# EAGLE board Serial-Basic-CH340C-Panel (EAGLE 9.2.1), part 1 of 7
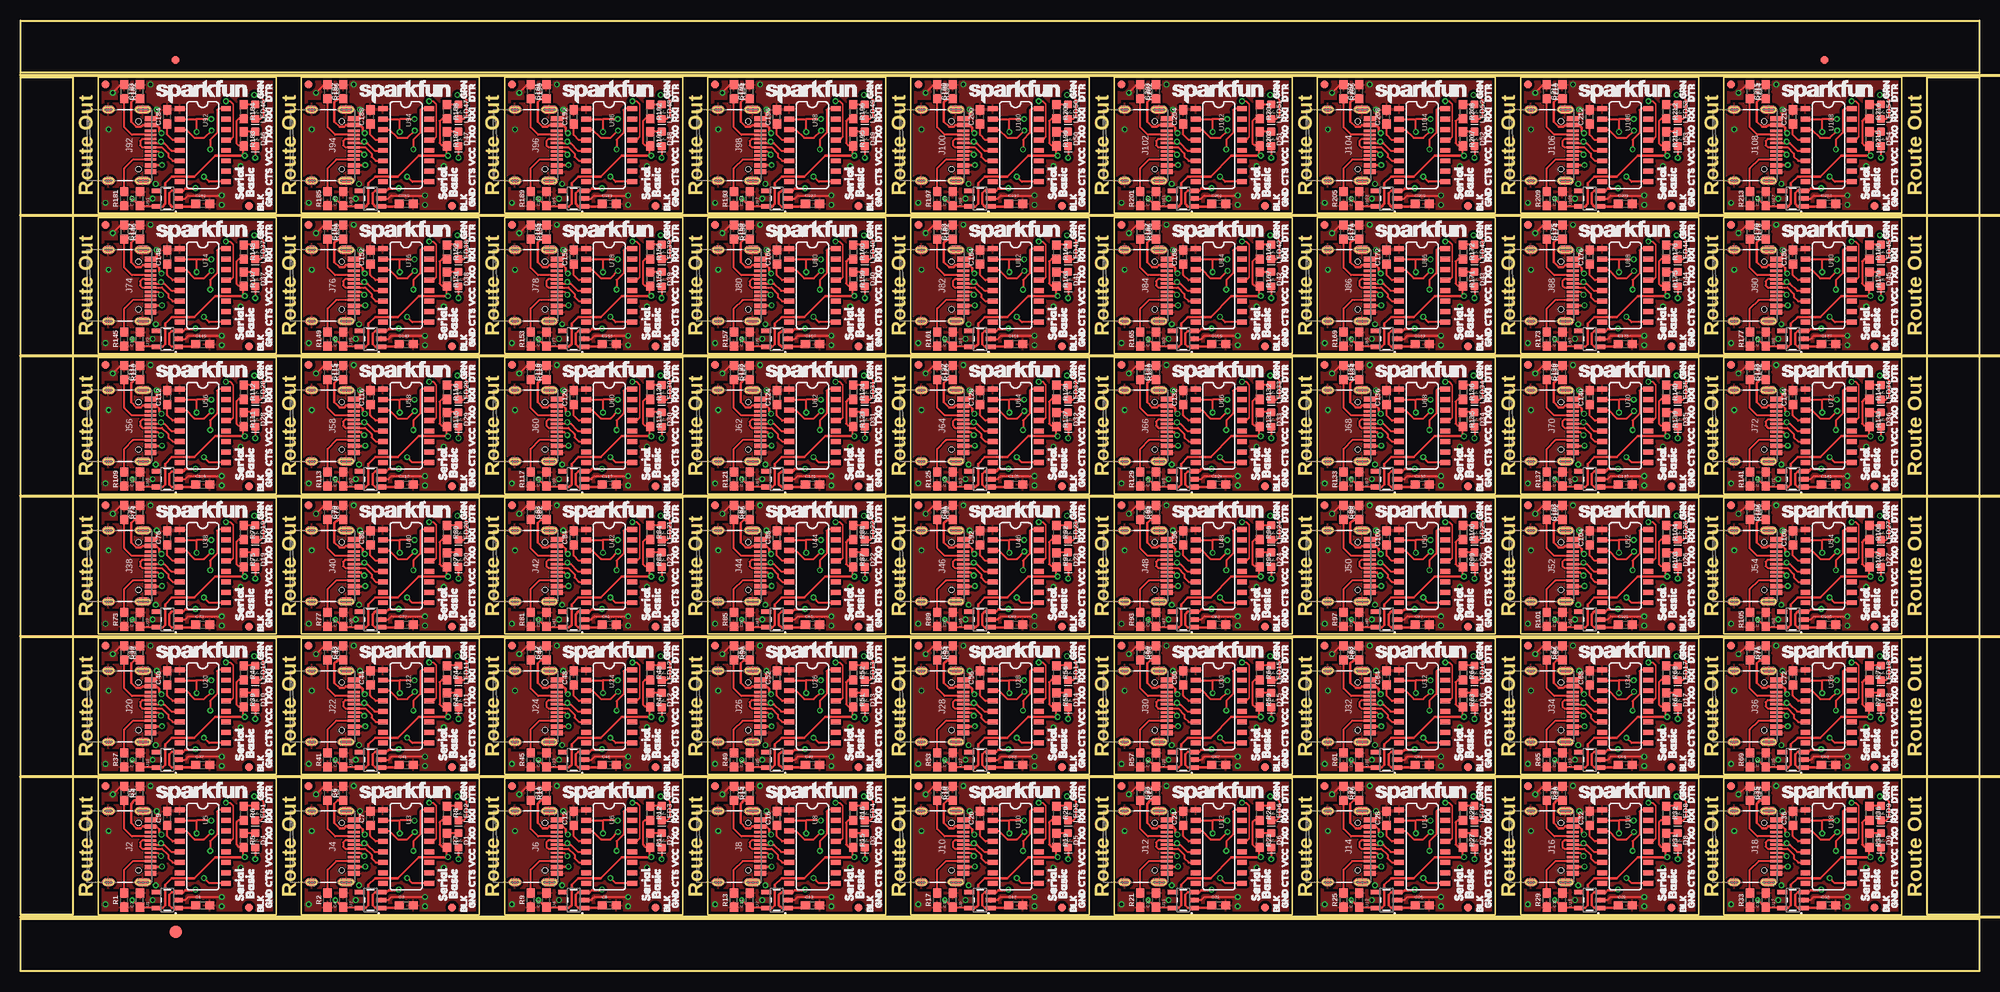
[diagram p0: board, top side]
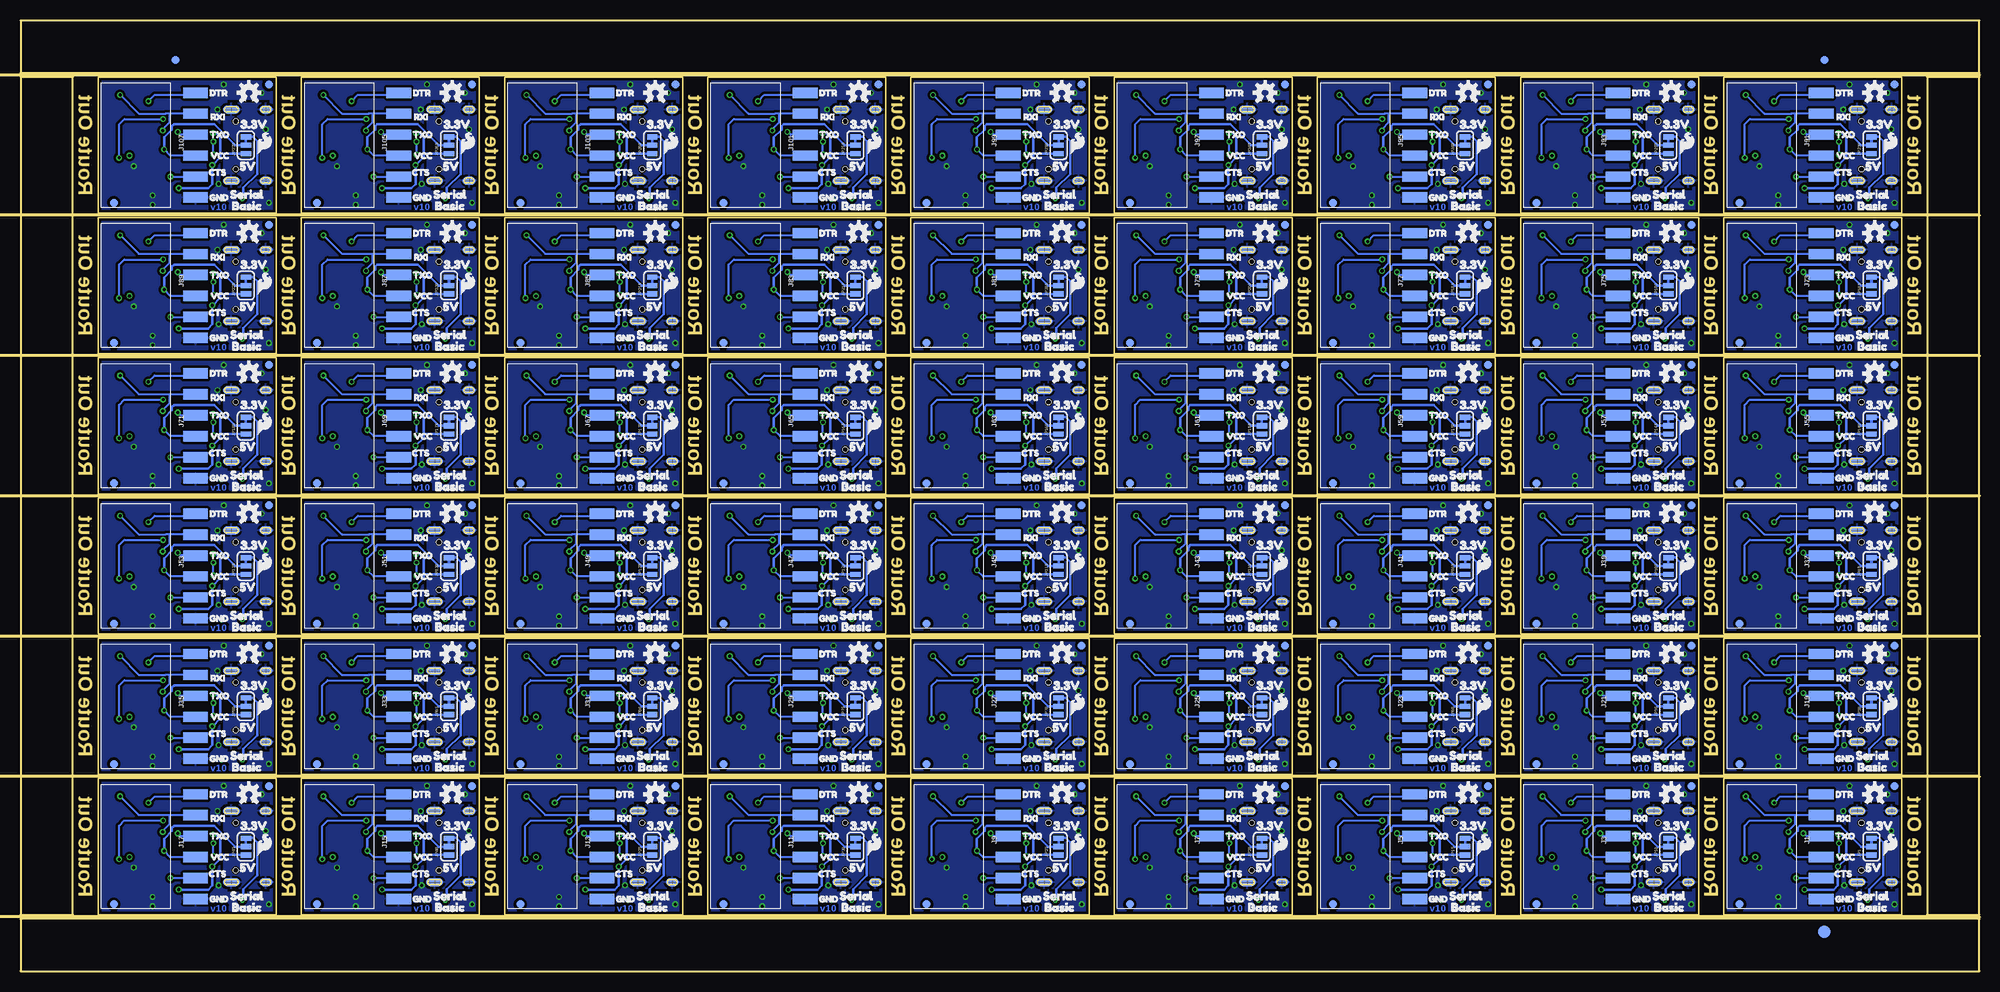
[diagram p1: board, bottom side, seen from below]

Size 237.49 x 115.32 mm. Coordinates in mm from the lower left corner, seen from the top.
Outline: 232 segments
Copper layers (1*16): Top 0.035mm / dielectric 1.5mm / Bottom 0.035mm
Design rules "SparkFun-2-layer-PCBWay-LIMIT": minimum track width 6mil, minimum drill 0.3mm, track to track 6mil, track to pad 6mil, pad to pad 6mil, via to via 6mil, smd to smd 6mil, copper to edge 6mil, drill to drill 6mil, minimum pad ring 6mil, minimum via ring 6mil, stop-mask expansion 4mil, vias tented up to drill 25mil, thermal gap 10mil
Net classes: 1 power: width 0.178 mm
Milling: 7 lines

## Footprints (pad centres in the part's own frame; a part is rotated, then mirrored left to right if it is on the bottom)
0603 = smd 1.1 x 1: 1 -0.85,0; 2 0.85,0
LED-0603 = smd 1 x 1: A -0.877,0; C 0.877,0
FIDUCIAL-1X2 = smd 1 x 1: 1 0,0
FIDUCIAL-1.5X3 = smd 1.5 x 1.5: 1 0,0
1X06-SMD-FEMALE = smd 1.25 x 3: 1 6.35,3.425; 2 3.81,3.425; 3 1.27,3.425; 4 -1.27,3.425; 5 -3.81,3.425; 6 -6.35,3.425
USB-C-16P = smd 0.3 x 1.45: A5 -1.25,0; A6 -0.25,0; A7 0.25,0; A8 1.25,0; B5 1.75,0; B6 0.75,0; B7 -0.75,0; B8 -1.75,0 | smd 0.6 x 1.45: GND -3.225,0; GND2 3.225,0 | smd 1 x 2.1: SHLD1 -4.32,-0.915; SHLD2 4.32,-0.915 | smd 1 x 2.1 bottom: SHLD3 -4.32,-0.915; SHLD4 4.32,-0.915 | smd 1 x 1.6: SHLD5 -4.32,-5.095; SHLD8 4.32,-5.095 | smd 1 x 1.6 bottom: SHLD6 -4.32,-5.095; SHLD7 4.32,-5.095 | smd 0.55 x 1.45: VBUS1 -2.45,0; VBUS2 2.45,0 | hole 0.65: -2.89,-1.445; 2.89,-1.445
SMT-JUMPER_3_1-NC_TRACE_SILK = smd 0.635 x 1.27: 1 -1.016,0; 2 0,0; 3 1.016,0
SOT23-5 = smd 0.55 x 1.2: 1 -0.95,-1.3; 2 0,-1.3; 3 0.95,-1.3; 4 0.95,1.3; 5 -0.95,1.3
SO016 = smd 0.6 x 1.2: 1 -4.445,-2.8; 2 -3.175,-2.8; 3 -1.905,-2.8; 4 -0.635,-2.8; 5 0.635,-2.8; 6 1.905,-2.8; 7 3.175,-2.8; 8 4.445,-2.8; 9 4.445,2.8; 10 3.175,2.8; 11 1.905,2.8; 12 0.635,2.8; 13 -0.635,2.8; 14 -1.905,2.8; 15 -3.175,2.8; 16 -4.445,2.8

## Placement (x,y rotation side)
C1  1.0uF  [0603]  22.1,8 0 top
C2  1.0uF  [0603]  14.48,8.64 90 top
C3  1.0uF  [0603]  46.74,8 0 top
C4  1.0uF  [0603]  39.12,8.64 90 top
C5  0.1uF  [0603]  14.48,21.59 90 top
C6  0.1uF  [0603]  39.12,21.59 90 top
C7  10nF  [0603]  42.42,18.54 90 top
C8  1.0uF  [0603]  71.37,8 0 top
C9  10nF  [0603]  17.78,18.54 90 top
C10  1.0uF  [0603]  63.75,8.64 90 top
C11  0.1uF  [0603]  63.75,21.59 90 top
C12  10nF  [0603]  67.06,18.54 90 top
C13  1.0uF  [0603]  96.01,8 0 top
C14  1.0uF  [0603]  88.39,8.64 90 top
C15  0.1uF  [0603]  88.39,21.59 90 top
C16  10nF  [0603]  91.69,18.54 90 top
C17  1.0uF  [0603]  120.65,8 0 top
C18  1.0uF  [0603]  113.03,8.64 90 top
C19  0.1uF  [0603]  113.03,21.59 90 top
C20  10nF  [0603]  116.33,18.54 90 top
C21  1.0uF  [0603]  145.29,8 0 top
C22  1.0uF  [0603]  137.67,8.64 90 top
C23  0.1uF  [0603]  137.67,21.59 90 top
C24  10nF  [0603]  140.97,18.54 90 top
C25  1.0uF  [0603]  169.93,8 0 top
C26  1.0uF  [0603]  162.31,8.64 90 top
C27  0.1uF  [0603]  162.31,21.59 90 top
C28  10nF  [0603]  165.61,18.54 90 top
C29  1.0uF  [0603]  194.56,8 0 top
C30  1.0uF  [0603]  186.94,8.64 90 top
C31  0.1uF  [0603]  186.94,21.59 90 top
C32  10nF  [0603]  190.25,18.54 90 top
C33  1.0uF  [0603]  219.2,8 0 top
C34  1.0uF  [0603]  211.58,8.64 90 top
C35  0.1uF  [0603]  211.58,21.59 90 top
C36  10nF  [0603]  214.88,18.54 90 top
C37  1.0uF  [0603]  22.1,25.02 0 top
C38  1.0uF  [0603]  14.48,25.65 90 top
C39  0.1uF  [0603]  14.48,38.61 90 top
C40  10nF  [0603]  17.78,35.56 90 top
C41  1.0uF  [0603]  46.74,25.02 0 top
C42  1.0uF  [0603]  39.12,25.65 90 top
C43  0.1uF  [0603]  39.12,38.61 90 top
C44  10nF  [0603]  42.42,35.56 90 top
C45  1.0uF  [0603]  71.37,25.02 0 top
C46  1.0uF  [0603]  63.75,25.65 90 top
C47  0.1uF  [0603]  63.75,38.61 90 top
C48  10nF  [0603]  67.06,35.56 90 top
C49  1.0uF  [0603]  96.01,25.02 0 top
C50  1.0uF  [0603]  88.39,25.65 90 top
C51  0.1uF  [0603]  88.39,38.61 90 top
C52  10nF  [0603]  91.69,35.56 90 top
C53  1.0uF  [0603]  120.65,25.02 0 top
C54  1.0uF  [0603]  113.03,25.65 90 top
C55  0.1uF  [0603]  113.03,38.61 90 top
C56  10nF  [0603]  116.33,35.56 90 top
C57  1.0uF  [0603]  145.29,25.02 0 top
C58  1.0uF  [0603]  137.67,25.65 90 top
C59  0.1uF  [0603]  137.67,38.61 90 top
C60  10nF  [0603]  140.97,35.56 90 top
C61  1.0uF  [0603]  169.93,25.02 0 top
C62  1.0uF  [0603]  162.31,25.65 90 top
C63  0.1uF  [0603]  162.31,38.61 90 top
C64  10nF  [0603]  165.61,35.56 90 top
C65  1.0uF  [0603]  194.56,25.02 0 top
C66  1.0uF  [0603]  186.94,25.65 90 top
C67  0.1uF  [0603]  186.94,38.61 90 top
C68  10nF  [0603]  190.25,35.56 90 top
C69  1.0uF  [0603]  219.2,25.02 0 top
C70  1.0uF  [0603]  211.58,25.65 90 top
C71  0.1uF  [0603]  211.58,38.61 90 top
C72  10nF  [0603]  214.88,35.56 90 top
C73  1.0uF  [0603]  22.1,42.04 0 top
C74  1.0uF  [0603]  14.48,42.67 90 top
C75  0.1uF  [0603]  14.48,55.63 90 top
C76  10nF  [0603]  17.78,52.58 90 top
C77  1.0uF  [0603]  46.74,42.04 0 top
C78  1.0uF  [0603]  39.12,42.67 90 top
C79  0.1uF  [0603]  39.12,55.63 90 top
C80  10nF  [0603]  42.42,52.58 90 top
C81  1.0uF  [0603]  71.37,42.04 0 top
C82  1.0uF  [0603]  63.75,42.67 90 top
C83  0.1uF  [0603]  63.75,55.63 90 top
C84  10nF  [0603]  67.06,52.58 90 top
C85  1.0uF  [0603]  96.01,42.04 0 top
C86  1.0uF  [0603]  88.39,42.67 90 top
C87  0.1uF  [0603]  88.39,55.63 90 top
C88  10nF  [0603]  91.69,52.58 90 top
C89  1.0uF  [0603]  120.65,42.04 0 top
C90  1.0uF  [0603]  113.03,42.67 90 top
C91  0.1uF  [0603]  113.03,55.63 90 top
C92  10nF  [0603]  116.33,52.58 90 top
C93  1.0uF  [0603]  145.29,42.04 0 top
C94  1.0uF  [0603]  137.67,42.67 90 top
C95  0.1uF  [0603]  137.67,55.63 90 top
C96  10nF  [0603]  140.97,52.58 90 top
C97  1.0uF  [0603]  169.93,42.04 0 top
C98  1.0uF  [0603]  162.31,42.67 90 top
C99  0.1uF  [0603]  162.31,55.63 90 top
C100  10nF  [0603]  165.61,52.58 90 top
C101  1.0uF  [0603]  194.56,42.04 0 top
C102  1.0uF  [0603]  186.94,42.67 90 top
C103  0.1uF  [0603]  186.94,55.63 90 top
C104  10nF  [0603]  190.25,52.58 90 top
C105  1.0uF  [0603]  219.2,42.04 0 top
C106  1.0uF  [0603]  211.58,42.67 90 top
C107  0.1uF  [0603]  211.58,55.63 90 top
C108  10nF  [0603]  214.88,52.58 90 top
C109  1.0uF  [0603]  22.1,59.05 0 top
C110  1.0uF  [0603]  14.48,59.69 90 top
C111  0.1uF  [0603]  14.48,72.64 90 top
C112  10nF  [0603]  17.78,69.6 90 top
C113  1.0uF  [0603]  46.74,59.05 0 top
C114  1.0uF  [0603]  39.12,59.69 90 top
C115  0.1uF  [0603]  39.12,72.64 90 top
C116  10nF  [0603]  42.42,69.6 90 top
C117  1.0uF  [0603]  71.37,59.05 0 top
C118  1.0uF  [0603]  63.75,59.69 90 top
C119  0.1uF  [0603]  63.75,72.64 90 top
C120  10nF  [0603]  67.06,69.6 90 top
C121  1.0uF  [0603]  96.01,59.05 0 top
C122  1.0uF  [0603]  88.39,59.69 90 top
C123  0.1uF  [0603]  88.39,72.64 90 top
C124  10nF  [0603]  91.69,69.6 90 top
C125  1.0uF  [0603]  120.65,59.05 0 top
C126  1.0uF  [0603]  113.03,59.69 90 top
C127  0.1uF  [0603]  113.03,72.64 90 top
C128  10nF  [0603]  116.33,69.6 90 top
C129  1.0uF  [0603]  145.29,59.05 0 top
C130  1.0uF  [0603]  137.67,59.69 90 top
C131  0.1uF  [0603]  137.67,72.64 90 top
C132  10nF  [0603]  140.97,69.6 90 top
C133  1.0uF  [0603]  169.93,59.05 0 top
C134  1.0uF  [0603]  162.31,59.69 90 top
C135  0.1uF  [0603]  162.31,72.64 90 top
C136  10nF  [0603]  165.61,69.6 90 top
C137  1.0uF  [0603]  194.56,59.05 0 top
C138  1.0uF  [0603]  186.94,59.69 90 top
C139  0.1uF  [0603]  186.94,72.64 90 top
C140  10nF  [0603]  190.25,69.6 90 top
C141  1.0uF  [0603]  219.2,59.05 0 top
C142  1.0uF  [0603]  211.58,59.69 90 top
C143  0.1uF  [0603]  211.58,72.64 90 top
C144  10nF  [0603]  214.88,69.6 90 top
C145  1.0uF  [0603]  22.1,76.07 0 top
C146  1.0uF  [0603]  14.48,76.71 90 top
C147  0.1uF  [0603]  14.48,89.66 90 top
C148  10nF  [0603]  17.78,86.61 90 top
C149  1.0uF  [0603]  46.74,76.07 0 top
C150  1.0uF  [0603]  39.12,76.71 90 top
C151  0.1uF  [0603]  39.12,89.66 90 top
C152  10nF  [0603]  42.42,86.61 90 top
C153  1.0uF  [0603]  71.37,76.07 0 top
C154  1.0uF  [0603]  63.75,76.71 90 top
C155  0.1uF  [0603]  63.75,89.66 90 top
C156  10nF  [0603]  67.06,86.61 90 top
C157  1.0uF  [0603]  96.01,76.07 0 top
C158  1.0uF  [0603]  88.39,76.71 90 top
C159  0.1uF  [0603]  88.39,89.66 90 top
C160  10nF  [0603]  91.69,86.61 90 top
C161  1.0uF  [0603]  120.65,76.07 0 top
C162  1.0uF  [0603]  113.03,76.71 90 top
C163  0.1uF  [0603]  113.03,89.66 90 top
C164  10nF  [0603]  116.33,86.61 90 top
C165  1.0uF  [0603]  145.29,76.07 0 top
C166  1.0uF  [0603]  137.67,76.71 90 top
C167  0.1uF  [0603]  137.67,89.66 90 top
C168  10nF  [0603]  140.97,86.61 90 top
C169  1.0uF  [0603]  169.93,76.07 0 top
C170  1.0uF  [0603]  162.31,76.71 90 top
C171  0.1uF  [0603]  162.31,89.66 90 top
C172  10nF  [0603]  165.61,86.61 90 top
C173  1.0uF  [0603]  194.56,76.07 0 top
C174  1.0uF  [0603]  186.94,76.71 90 top
C175  0.1uF  [0603]  186.94,89.66 90 top
C176  10nF  [0603]  190.25,86.61 90 top
C177  1.0uF  [0603]  219.2,76.07 0 top
C178  1.0uF  [0603]  211.58,76.71 90 top
C179  0.1uF  [0603]  211.58,89.66 90 top
C180  10nF  [0603]  214.88,86.61 90 top
C181  1.0uF  [0603]  22.1,93.09 0 top
C182  1.0uF  [0603]  14.48,93.73 90 top
C183  0.1uF  [0603]  14.48,106.68 90 top
C184  10nF  [0603]  17.78,103.63 90 top
C185  1.0uF  [0603]  46.74,93.09 0 top
C186  1.0uF  [0603]  39.12,93.73 90 top
C187  0.1uF  [0603]  39.12,106.68 90 top
C188  10nF  [0603]  42.42,103.63 90 top
C189  1.0uF  [0603]  71.37,93.09 0 top
C190  1.0uF  [0603]  63.75,93.73 90 top
C191  0.1uF  [0603]  63.75,106.68 90 top
C192  10nF  [0603]  67.06,103.63 90 top
C193  1.0uF  [0603]  96.01,93.09 0 top
C194  1.0uF  [0603]  88.39,93.73 90 top
C195  0.1uF  [0603]  88.39,106.68 90 top
C196  10nF  [0603]  91.69,103.63 90 top
C197  1.0uF  [0603]  120.65,93.09 0 top
C198  1.0uF  [0603]  113.03,93.73 90 top
C199  0.1uF  [0603]  113.03,106.68 90 top
C200  10nF  [0603]  116.33,103.63 90 top
C201  1.0uF  [0603]  145.29,93.09 0 top
C202  1.0uF  [0603]  137.67,93.73 90 top
C203  0.1uF  [0603]  137.67,106.68 90 top
C204  10nF  [0603]  140.97,103.63 90 top
C205  1.0uF  [0603]  169.93,93.09 0 top
C206  1.0uF  [0603]  162.31,93.73 90 top
C207  0.1uF  [0603]  162.31,106.68 90 top
C208  10nF  [0603]  165.61,103.63 90 top
C209  1.0uF  [0603]  194.56,93.09 0 top
C210  1.0uF  [0603]  186.94,93.73 90 top
C211  0.1uF  [0603]  186.94,106.68 90 top
C212  10nF  [0603]  190.25,103.63 90 top
C213  1.0uF  [0603]  219.2,93.09 0 top
C214  1.0uF  [0603]  211.58,93.73 90 top
C215  0.1uF  [0603]  211.58,106.68 90 top
C216  10nF  [0603]  214.88,103.63 90 top
D1  Yellow  [LED-0603]  53.09,15.88 270 top
D2  Yellow  [LED-0603]  77.72,15.88 270 top
D3  Yellow  [LED-0603]  102.36,15.88 270 top
D4  Yellow  [LED-0603]  28.45,15.88 270 top
D5  Yellow  [LED-0603]  127,15.88 270 top
D6  Yellow  [LED-0603]  151.64,15.88 270 top
D7  Yellow  [LED-0603]  176.28,15.88 270 top
D8  Yellow  [LED-0603]  200.91,15.88 270 top
D9  Yellow  [LED-0603]  225.55,15.88 270 top
D10  Yellow  [LED-0603]  28.45,32.89 270 top
D11  Yellow  [LED-0603]  53.09,32.89 270 top
D12  Yellow  [LED-0603]  77.72,32.89 270 top
D13  Yellow  [LED-0603]  102.36,32.89 270 top
D14  Yellow  [LED-0603]  127,32.89 270 top
D15  Yellow  [LED-0603]  151.64,32.89 270 top
D16  Yellow  [LED-0603]  176.28,32.89 270 top
D17  Yellow  [LED-0603]  200.91,32.89 270 top
D18  Yellow  [LED-0603]  225.55,32.89 270 top
D19  Yellow  [LED-0603]  28.45,49.91 270 top
D20  Yellow  [LED-0603]  53.09,49.91 270 top
D21  Yellow  [LED-0603]  77.72,49.91 270 top
D22  Yellow  [LED-0603]  102.36,49.91 270 top
D23  Yellow  [LED-0603]  127,49.91 270 top
D24  Yellow  [LED-0603]  151.64,49.91 270 top
D25  Yellow  [LED-0603]  176.28,49.91 270 top
D26  Yellow  [LED-0603]  200.91,49.91 270 top
D27  Yellow  [LED-0603]  225.55,49.91 270 top
D28  Yellow  [LED-0603]  28.45,66.93 270 top
D29  Yellow  [LED-0603]  53.09,66.93 270 top
D30  Yellow  [LED-0603]  77.72,66.93 270 top
D31  Yellow  [LED-0603]  102.36,66.93 270 top
D32  Yellow  [LED-0603]  127,66.93 270 top
D33  Yellow  [LED-0603]  151.64,66.93 270 top
D34  Yellow  [LED-0603]  176.28,66.93 270 top
D35  Yellow  [LED-0603]  200.91,66.93 270 top
D36  Yellow  [LED-0603]  225.55,66.93 270 top
D37  Yellow  [LED-0603]  28.45,83.95 270 top
D38  Yellow  [LED-0603]  53.09,83.95 270 top
D39  Yellow  [LED-0603]  77.72,83.95 270 top
D40  Yellow  [LED-0603]  102.36,83.95 270 top
D41  Yellow  [LED-0603]  127,83.95 270 top
D42  Yellow  [LED-0603]  151.64,83.95 270 top
D43  Yellow  [LED-0603]  176.28,83.95 270 top
D44  Yellow  [LED-0603]  200.91,83.95 270 top
D45  Yellow  [LED-0603]  225.55,83.95 270 top
D46  Yellow  [LED-0603]  28.45,100.97 270 top
D47  Yellow  [LED-0603]  53.09,100.97 270 top
D48  Yellow  [LED-0603]  77.72,100.97 270 top
D49  Yellow  [LED-0603]  102.36,100.97 270 top
D50  Yellow  [LED-0603]  127,100.97 270 top
D51  Yellow  [LED-0603]  151.64,100.97 270 top
D52  Yellow  [LED-0603]  176.28,100.97 270 top
D53  Yellow  [LED-0603]  200.91,100.97 270 top
D54  Yellow  [LED-0603]  225.55,100.97 270 top
E$1  [FIDUCIAL-1X2]  18.8,110.55 0 top
E$2  [FIDUCIAL-1X2]  18.8,110.55 0 bottom
E$3  [FIDUCIAL-1X2]  218.69,110.55 0 top
E$4  [FIDUCIAL-1X2]  218.69,110.55 0 bottom
E$5  [FIDUCIAL-1.5X3]  18.8,4.76 0 top
E$6  [FIDUCIAL-1.5X3]  18.8,4.76 0 bottom
J1  [1X06-SMD-FEMALE]  22.61,15.11 270 bottom
J2  [USB-C-16P]  15.75,15.11 270 top
J3  [1X06-SMD-FEMALE]  47.24,15.11 270 bottom
J4  [USB-C-16P]  40.39,15.11 270 top
J5  [1X06-SMD-FEMALE]  71.88,15.11 270 bottom
J6  [USB-C-16P]  65.02,15.11 270 top
J7  [1X06-SMD-FEMALE]  96.52,15.11 270 bottom
J8  [USB-C-16P]  89.66,15.11 270 top
J9  [1X06-SMD-FEMALE]  121.16,15.11 270 bottom
J10  [USB-C-16P]  114.3,15.11 270 top
J11  [1X06-SMD-FEMALE]  145.8,15.11 270 bottom
J12  [USB-C-16P]  138.94,15.11 270 top
J13  [1X06-SMD-FEMALE]  170.43,15.11 270 bottom
J14  [USB-C-16P]  163.58,15.11 270 top
J15  [1X06-SMD-FEMALE]  195.07,15.11 270 bottom
J16  [USB-C-16P]  188.21,15.11 270 top
J17  [1X06-SMD-FEMALE]  219.71,15.11 270 bottom
J18  [USB-C-16P]  212.85,15.11 270 top
J19  [1X06-SMD-FEMALE]  22.61,32.13 270 bottom
J20  [USB-C-16P]  15.75,32.13 270 top
J21  [1X06-SMD-FEMALE]  47.24,32.13 270 bottom
J22  [USB-C-16P]  40.39,32.13 270 top
J23  [1X06-SMD-FEMALE]  71.88,32.13 270 bottom
J24  [USB-C-16P]  65.02,32.13 270 top
J25  [1X06-SMD-FEMALE]  96.52,32.13 270 bottom
J26  [USB-C-16P]  89.66,32.13 270 top
J27  [1X06-SMD-FEMALE]  121.16,32.13 270 bottom
J28  [USB-C-16P]  114.3,32.13 270 top
J29  [1X06-SMD-FEMALE]  145.8,32.13 270 bottom
J30  [USB-C-16P]  138.94,32.13 270 top
J31  [1X06-SMD-FEMALE]  170.43,32.13 270 bottom
J32  [USB-C-16P]  163.58,32.13 270 top
J33  [1X06-SMD-FEMALE]  195.07,32.13 270 bottom
J34  [USB-C-16P]  188.21,32.13 270 top
J35  [1X06-SMD-FEMALE]  219.71,32.13 270 bottom
J36  [USB-C-16P]  212.85,32.13 270 top
J37  [1X06-SMD-FEMALE]  22.61,49.15 270 bottom
J38  [USB-C-16P]  15.75,49.15 270 top
J39  [1X06-SMD-FEMALE]  47.24,49.15 270 bottom
J40  [USB-C-16P]  40.39,49.15 270 top
J41  [1X06-SMD-FEMALE]  71.88,49.15 270 bottom
J42  [USB-C-16P]  65.02,49.15 270 top
J43  [1X06-SMD-FEMALE]  96.52,49.15 270 bottom
J44  [USB-C-16P]  89.66,49.15 270 top
J45  [1X06-SMD-FEMALE]  121.16,49.15 270 bottom
J46  [USB-C-16P]  114.3,49.15 270 top
J47  [1X06-SMD-FEMALE]  145.8,49.15 270 bottom
J48  [USB-C-16P]  138.94,49.15 270 top
J49  [1X06-SMD-FEMALE]  170.43,49.15 270 bottom
J50  [USB-C-16P]  163.58,49.15 270 top
J51  [1X06-SMD-FEMALE]  195.07,49.15 270 bottom
J52  [USB-C-16P]  188.21,49.15 270 top
J53  [1X06-SMD-FEMALE]  219.71,49.15 270 bottom
J54  [USB-C-16P]  212.85,49.15 270 top
J55  [1X06-SMD-FEMALE]  22.61,66.17 270 bottom
J56  [USB-C-16P]  15.75,66.17 270 top
J57  [1X06-SMD-FEMALE]  47.24,66.17 270 bottom
J58  [USB-C-16P]  40.39,66.17 270 top
J59  [1X06-SMD-FEMALE]  71.88,66.17 270 bottom
J60  [USB-C-16P]  65.02,66.17 270 top
J61  [1X06-SMD-FEMALE]  96.52,66.17 270 bottom
J62  [USB-C-16P]  89.66,66.17 270 top
J63  [1X06-SMD-FEMALE]  121.16,66.17 270 bottom
J64  [USB-C-16P]  114.3,66.17 270 top
J65  [1X06-SMD-FEMALE]  145.8,66.17 270 bottom
J66  [USB-C-16P]  138.94,66.17 270 top
J67  [1X06-SMD-FEMALE]  170.43,66.17 270 bottom
J68  [USB-C-16P]  163.58,66.17 270 top
J69  [1X06-SMD-FEMALE]  195.07,66.17 270 bottom
J70  [USB-C-16P]  188.21,66.17 270 top
J71  [1X06-SMD-FEMALE]  219.71,66.17 270 bottom
J72  [USB-C-16P]  212.85,66.17 270 top
J73  [1X06-SMD-FEMALE]  22.61,83.19 270 bottom
J74  [USB-C-16P]  15.75,83.19 270 top
J75  [1X06-SMD-FEMALE]  47.24,83.19 270 bottom
J76  [USB-C-16P]  40.39,83.19 270 top
J77  [1X06-SMD-FEMALE]  71.88,83.19 270 bottom
J78  [USB-C-16P]  65.02,83.19 270 top
J79  [1X06-SMD-FEMALE]  96.52,83.19 270 bottom
J80  [USB-C-16P]  89.66,83.19 270 top
J81  [1X06-SMD-FEMALE]  121.16,83.19 270 bottom
J82  [USB-C-16P]  114.3,83.19 270 top
J83  [1X06-SMD-FEMALE]  145.8,83.19 270 bottom
J84  [USB-C-16P]  138.94,83.19 270 top
J85  [1X06-SMD-FEMALE]  170.43,83.19 270 bottom
J86  [USB-C-16P]  163.58,83.19 270 top
J87  [1X06-SMD-FEMALE]  195.07,83.19 270 bottom
J88  [USB-C-16P]  188.21,83.19 270 top
J89  [1X06-SMD-FEMALE]  219.71,83.19 270 bottom
J90  [USB-C-16P]  212.85,83.19 270 top
J91  [1X06-SMD-FEMALE]  22.61,100.2 270 bottom
J92  [USB-C-16P]  15.75,100.2 270 top
J93  [1X06-SMD-FEMALE]  47.24,100.2 270 bottom
J94  [USB-C-16P]  40.39,100.2 270 top
J95  [1X06-SMD-FEMALE]  71.88,100.2 270 bottom
J96  [USB-C-16P]  65.02,100.2 270 top
J97  [1X06-SMD-FEMALE]  96.52,100.2 270 bottom
J98  [USB-C-16P]  89.66,100.2 270 top
J99  [1X06-SMD-FEMALE]  121.16,100.2 270 bottom
J100  [USB-C-16P]  114.3,100.2 270 top
J101  [1X06-SMD-FEMALE]  145.8,100.2 270 bottom
J102  [USB-C-16P]  138.94,100.2 270 top
J103  [1X06-SMD-FEMALE]  170.43,100.2 270 bottom
J104  [USB-C-16P]  163.58,100.2 270 top
J105  [1X06-SMD-FEMALE]  195.07,100.2 270 bottom
J106  [USB-C-16P]  188.21,100.2 270 top
J107  [1X06-SMD-FEMALE]  219.71,100.2 270 bottom
J108  [USB-C-16P]  212.85,100.2 270 top
JP1  [SMT-JUMPER_3_1-NC_TRACE_SILK]  13.08,15.11 90 bottom
JP2  FIDUCIAL1X2  [FIDUCIAL-1X2]  34.92,22.48 180 top
JP3  FIDUCIAL1X2  [FIDUCIAL-1X2]  10.29,22.48 180 top
JP4  FIDUCIAL1X2  [FIDUCIAL-1X2]  27.69,7.75 180 top
JP5  FIDUCIAL1X2  [FIDUCIAL-1X2]  10.29,22.48 180 bottom
JP6  FIDUCIAL1X2  [FIDUCIAL-1X2]  29.08,8.13 180 bottom
JP7  FIDUCIAL1X2  [FIDUCIAL-1X2]  52.32,7.75 180 top
JP8  FIDUCIAL1X2  [FIDUCIAL-1X2]  34.92,22.48 180 bottom
JP9  FIDUCIAL1X2  [FIDUCIAL-1X2]  53.72,8.13 180 bottom
JP10  [SMT-JUMPER_3_1-NC_TRACE_SILK]  37.72,15.11 90 bottom
JP11  FIDUCIAL1X2  [FIDUCIAL-1X2]  59.56,22.48 180 top
JP12  FIDUCIAL1X2  [FIDUCIAL-1X2]  76.96,7.75 180 top
JP13  FIDUCIAL1X2  [FIDUCIAL-1X2]  59.56,22.48 180 bottom
JP14  FIDUCIAL1X2  [FIDUCIAL-1X2]  78.36,8.13 180 bottom
JP15  [SMT-JUMPER_3_1-NC_TRACE_SILK]  62.36,15.11 90 bottom
JP16  FIDUCIAL1X2  [FIDUCIAL-1X2]  84.2,22.48 180 top
JP17  FIDUCIAL1X2  [FIDUCIAL-1X2]  101.6,7.75 180 top
JP18  FIDUCIAL1X2  [FIDUCIAL-1X2]  84.2,22.48 180 bottom
JP19  FIDUCIAL1X2  [FIDUCIAL-1X2]  103,8.13 180 bottom
JP20  [SMT-JUMPER_3_1-NC_TRACE_SILK]  86.99,15.11 90 bottom
JP21  FIDUCIAL1X2  [FIDUCIAL-1X2]  108.84,22.48 180 top
JP22  FIDUCIAL1X2  [FIDUCIAL-1X2]  126.24,7.75 180 top
JP23  FIDUCIAL1X2  [FIDUCIAL-1X2]  108.84,22.48 180 bottom
JP24  FIDUCIAL1X2  [FIDUCIAL-1X2]  127.63,8.13 180 bottom
JP25  [SMT-JUMPER_3_1-NC_TRACE_SILK]  111.63,15.11 90 bottom
JP26  FIDUCIAL1X2  [FIDUCIAL-1X2]  133.48,22.48 180 top
JP27  FIDUCIAL1X2  [FIDUCIAL-1X2]  150.88,7.75 180 top
JP28  FIDUCIAL1X2  [FIDUCIAL-1X2]  133.48,22.48 180 bottom
JP29  FIDUCIAL1X2  [FIDUCIAL-1X2]  152.27,8.13 180 bottom
JP30  [SMT-JUMPER_3_1-NC_TRACE_SILK]  136.27,15.11 90 bottom
JP31  FIDUCIAL1X2  [FIDUCIAL-1X2]  158.12,22.48 180 top
JP32  FIDUCIAL1X2  [FIDUCIAL-1X2]  175.51,7.75 180 top
JP33  FIDUCIAL1X2  [FIDUCIAL-1X2]  158.12,22.48 180 bottom
JP34  FIDUCIAL1X2  [FIDUCIAL-1X2]  176.91,8.13 180 bottom
JP35  [SMT-JUMPER_3_1-NC_TRACE_SILK]  160.91,15.11 90 bottom
JP36  FIDUCIAL1X2  [FIDUCIAL-1X2]  182.75,22.48 180 top
JP37  FIDUCIAL1X2  [FIDUCIAL-1X2]  200.15,7.75 180 top
JP38  FIDUCIAL1X2  [FIDUCIAL-1X2]  182.75,22.48 180 bottom
JP39  FIDUCIAL1X2  [FIDUCIAL-1X2]  201.55,8.13 180 bottom
JP40  [SMT-JUMPER_3_1-NC_TRACE_SILK]  185.55,15.11 90 bottom
JP41  FIDUCIAL1X2  [FIDUCIAL-1X2]  207.39,22.48 180 top
JP42  FIDUCIAL1X2  [FIDUCIAL-1X2]  224.79,7.75 180 top
JP43  FIDUCIAL1X2  [FIDUCIAL-1X2]  207.39,22.48 180 bottom
JP44  FIDUCIAL1X2  [FIDUCIAL-1X2]  226.19,8.13 180 bottom
JP45  [SMT-JUMPER_3_1-NC_TRACE_SILK]  210.19,15.11 90 bottom
JP46  FIDUCIAL1X2  [FIDUCIAL-1X2]  10.29,39.5 180 top
JP47  FIDUCIAL1X2  [FIDUCIAL-1X2]  27.69,24.77 180 top
JP48  FIDUCIAL1X2  [FIDUCIAL-1X2]  10.29,39.5 180 bottom
JP49  FIDUCIAL1X2  [FIDUCIAL-1X2]  29.08,25.15 180 bottom
JP50  [SMT-JUMPER_3_1-NC_TRACE_SILK]  13.08,32.13 90 bottom
JP51  FIDUCIAL1X2  [FIDUCIAL-1X2]  34.92,39.5 180 top
JP52  FIDUCIAL1X2  [FIDUCIAL-1X2]  52.32,24.77 180 top
JP53  FIDUCIAL1X2  [FIDUCIAL-1X2]  34.92,39.5 180 bottom
JP54  FIDUCIAL1X2  [FIDUCIAL-1X2]  53.72,25.15 180 bottom
JP55  [SMT-JUMPER_3_1-NC_TRACE_SILK]  37.72,32.13 90 bottom
JP56  FIDUCIAL1X2  [FIDUCIAL-1X2]  59.56,39.5 180 top
JP57  FIDUCIAL1X2  [FIDUCIAL-1X2]  76.96,24.77 180 top
JP58  FIDUCIAL1X2  [FIDUCIAL-1X2]  59.56,39.5 180 bottom
JP59  FIDUCIAL1X2  [FIDUCIAL-1X2]  78.36,25.15 180 bottom
JP60  [SMT-JUMPER_3_1-NC_TRACE_SILK]  62.36,32.13 90 bottom
JP61  FIDUCIAL1X2  [FIDUCIAL-1X2]  84.2,39.5 180 top
JP62  FIDUCIAL1X2  [FIDUCIAL-1X2]  101.6,24.77 180 top
JP63  FIDUCIAL1X2  [FIDUCIAL-1X2]  84.2,39.5 180 bottom
JP64  FIDUCIAL1X2  [FIDUCIAL-1X2]  103,25.15 180 bottom
JP65  [SMT-JUMPER_3_1-NC_TRACE_SILK]  86.99,32.13 90 bottom
JP66  FIDUCIAL1X2  [FIDUCIAL-1X2]  108.84,39.5 180 top
JP67  FIDUCIAL1X2  [FIDUCIAL-1X2]  126.24,24.77 180 top
JP68  FIDUCIAL1X2  [FIDUCIAL-1X2]  108.84,39.5 180 bottom
JP69  FIDUCIAL1X2  [FIDUCIAL-1X2]  127.63,25.15 180 bottom
JP70  [SMT-JUMPER_3_1-NC_TRACE_SILK]  111.63,32.13 90 bottom
JP71  FIDUCIAL1X2  [FIDUCIAL-1X2]  133.48,39.5 180 top
JP72  FIDUCIAL1X2  [FIDUCIAL-1X2]  150.88,24.77 180 top
JP73  FIDUCIAL1X2  [FIDUCIAL-1X2]  133.48,39.5 180 bottom
JP74  FIDUCIAL1X2  [FIDUCIAL-1X2]  152.27,25.15 180 bottom
JP75  [SMT-JUMPER_3_1-NC_TRACE_SILK]  136.27,32.13 90 bottom
JP76  FIDUCIAL1X2  [FIDUCIAL-1X2]  158.12,39.5 180 top
JP77  FIDUCIAL1X2  [FIDUCIAL-1X2]  175.51,24.77 180 top
JP78  FIDUCIAL1X2  [FIDUCIAL-1X2]  158.12,39.5 180 bottom
JP79  FIDUCIAL1X2  [FIDUCIAL-1X2]  176.91,25.15 180 bottom
JP80  [SMT-JUMPER_3_1-NC_TRACE_SILK]  160.91,32.13 90 bottom
JP81  FIDUCIAL1X2  [FIDUCIAL-1X2]  182.75,39.5 180 top
JP82  FIDUCIAL1X2  [FIDUCIAL-1X2]  200.15,24.77 180 top
JP83  FIDUCIAL1X2  [FIDUCIAL-1X2]  182.75,39.5 180 bottom
JP84  FIDUCIAL1X2  [FIDUCIAL-1X2]  201.55,25.15 180 bottom
JP85  [SMT-JUMPER_3_1-NC_TRACE_SILK]  185.55,32.13 90 bottom
JP86  FIDUCIAL1X2  [FIDUCIAL-1X2]  207.39,39.5 180 top
JP87  FIDUCIAL1X2  [FIDUCIAL-1X2]  224.79,24.77 180 top
JP88  FIDUCIAL1X2  [FIDUCIAL-1X2]  207.39,39.5 180 bottom
JP89  FIDUCIAL1X2  [FIDUCIAL-1X2]  226.19,25.15 180 bottom
JP90  [SMT-JUMPER_3_1-NC_TRACE_SILK]  210.19,32.13 90 bottom
JP91  FIDUCIAL1X2  [FIDUCIAL-1X2]  10.29,56.51 180 top
JP92  FIDUCIAL1X2  [FIDUCIAL-1X2]  27.69,41.78 180 top
JP93  FIDUCIAL1X2  [FIDUCIAL-1X2]  10.29,56.51 180 bottom
JP94  FIDUCIAL1X2  [FIDUCIAL-1X2]  29.08,42.16 180 bottom
JP95  [SMT-JUMPER_3_1-NC_TRACE_SILK]  13.08,49.15 90 bottom
JP96  FIDUCIAL1X2  [FIDUCIAL-1X2]  34.92,56.51 180 top
JP97  FIDUCIAL1X2  [FIDUCIAL-1X2]  52.32,41.78 180 top
JP98  FIDUCIAL1X2  [FIDUCIAL-1X2]  34.92,56.51 180 bottom
JP99  FIDUCIAL1X2  [FIDUCIAL-1X2]  53.72,42.16 180 bottom
JP100  [SMT-JUMPER_3_1-NC_TRACE_SILK]  37.72,49.15 90 bottom
JP101  FIDUCIAL1X2  [FIDUCIAL-1X2]  59.56,56.51 180 top
JP102  FIDUCIAL1X2  [FIDUCIAL-1X2]  76.96,41.78 180 top
JP103  FIDUCIAL1X2  [FIDUCIAL-1X2]  59.56,56.51 180 bottom
JP104  FIDUCIAL1X2  [FIDUCIAL-1X2]  78.36,42.16 180 bottom
JP105  [SMT-JUMPER_3_1-NC_TRACE_SILK]  62.36,49.15 90 bottom
JP106  FIDUCIAL1X2  [FIDUCIAL-1X2]  84.2,56.51 180 top
JP107  FIDUCIAL1X2  [FIDUCIAL-1X2]  101.6,41.78 180 top
JP108  FIDUCIAL1X2  [FIDUCIAL-1X2]  84.2,56.51 180 bottom
JP109  FIDUCIAL1X2  [FIDUCIAL-1X2]  103,42.16 180 bottom
JP110  [SMT-JUMPER_3_1-NC_TRACE_SILK]  86.99,49.15 90 bottom
JP111  FIDUCIAL1X2  [FIDUCIAL-1X2]  108.84,56.51 180 top
JP112  FIDUCIAL1X2  [FIDUCIAL-1X2]  126.24,41.78 180 top
JP113  FIDUCIAL1X2  [FIDUCIAL-1X2]  108.84,56.51 180 bottom
JP114  FIDUCIAL1X2  [FIDUCIAL-1X2]  127.63,42.16 180 bottom
JP115  [SMT-JUMPER_3_1-NC_TRACE_SILK]  111.63,49.15 90 bottom
JP116  FIDUCIAL1X2  [FIDUCIAL-1X2]  133.48,56.51 180 top
JP117  FIDUCIAL1X2  [FIDUCIAL-1X2]  150.88,41.78 180 top
JP118  FIDUCIAL1X2  [FIDUCIAL-1X2]  133.48,56.51 180 bottom
JP119  FIDUCIAL1X2  [FIDUCIAL-1X2]  152.27,42.16 180 bottom
JP120  [SMT-JUMPER_3_1-NC_TRACE_SILK]  136.27,49.15 90 bottom
JP121  FIDUCIAL1X2  [FIDUCIAL-1X2]  158.12,56.51 180 top
JP122  FIDUCIAL1X2  [FIDUCIAL-1X2]  175.51,41.78 180 top
JP123  FIDUCIAL1X2  [FIDUCIAL-1X2]  158.12,56.51 180 bottom
JP124  FIDUCIAL1X2  [FIDUCIAL-1X2]  176.91,42.16 180 bottom
JP125  [SMT-JUMPER_3_1-NC_TRACE_SILK]  160.91,49.15 90 bottom
JP126  FIDUCIAL1X2  [FIDUCIAL-1X2]  182.75,56.51 180 top
JP127  FIDUCIAL1X2  [FIDUCIAL-1X2]  200.15,41.78 180 top
JP128  FIDUCIAL1X2  [FIDUCIAL-1X2]  182.75,56.51 180 bottom
JP129  FIDUCIAL1X2  [FIDUCIAL-1X2]  201.55,42.16 180 bottom
JP130  [SMT-JUMPER_3_1-NC_TRACE_SILK]  185.55,49.15 90 bottom
JP131  FIDUCIAL1X2  [FIDUCIAL-1X2]  207.39,56.51 180 top
JP132  FIDUCIAL1X2  [FIDUCIAL-1X2]  224.79,41.78 180 top
JP133  FIDUCIAL1X2  [FIDUCIAL-1X2]  207.39,56.51 180 bottom
JP134  FIDUCIAL1X2  [FIDUCIAL-1X2]  226.19,42.16 180 bottom
JP135  [SMT-JUMPER_3_1-NC_TRACE_SILK]  210.19,49.15 90 bottom
JP136  FIDUCIAL1X2  [FIDUCIAL-1X2]  10.29,73.53 180 top
JP137  FIDUCIAL1X2  [FIDUCIAL-1X2]  27.69,58.8 180 top
JP138  FIDUCIAL1X2  [FIDUCIAL-1X2]  10.29,73.53 180 bottom
JP139  FIDUCIAL1X2  [FIDUCIAL-1X2]  29.08,59.18 180 bottom
JP140  [SMT-JUMPER_3_1-NC_TRACE_SILK]  13.08,66.17 90 bottom
JP141  FIDUCIAL1X2  [FIDUCIAL-1X2]  34.92,73.53 180 top
JP142  FIDUCIAL1X2  [FIDUCIAL-1X2]  52.32,58.8 180 top
JP143  FIDUCIAL1X2  [FIDUCIAL-1X2]  34.92,73.53 180 bottom
JP144  FIDUCIAL1X2  [FIDUCIAL-1X2]  53.72,59.18 180 bottom
JP145  [SMT-JUMPER_3_1-NC_TRACE_SILK]  37.72,66.17 90 bottom
JP146  FIDUCIAL1X2  [FIDUCIAL-1X2]  59.56,73.53 180 top
JP147  FIDUCIAL1X2  [FIDUCIAL-1X2]  76.96,58.8 180 top
JP148  FIDUCIAL1X2  [FIDUCIAL-1X2]  59.56,73.53 180 bottom
JP149  FIDUCIAL1X2  [FIDUCIAL-1X2]  78.36,59.18 180 bottom
JP150  [SMT-JUMPER_3_1-NC_TRACE_SILK]  62.36,66.17 90 bottom
JP151  FIDUCIAL1X2  [FIDUCIAL-1X2]  84.2,73.53 180 top
JP152  FIDUCIAL1X2  [FIDUCIAL-1X2]  101.6,58.8 180 top
JP153  FIDUCIAL1X2  [FIDUCIAL-1X2]  84.2,73.53 180 bottom
JP154  FIDUCIAL1X2  [FIDUCIAL-1X2]  103,59.18 180 bottom
JP155  [SMT-JUMPER_3_1-NC_TRACE_SILK]  86.99,66.17 90 bottom
JP156  FIDUCIAL1X2  [FIDUCIAL-1X2]  108.84,73.53 180 top
JP157  FIDUCIAL1X2  [FIDUCIAL-1X2]  126.24,58.8 180 top
JP158  FIDUCIAL1X2  [FIDUCIAL-1X2]  108.84,73.53 180 bottom
JP159  FIDUCIAL1X2  [FIDUCIAL-1X2]  127.63,59.18 180 bottom
JP160  [SMT-JUMPER_3_1-NC_TRACE_SILK]  111.63,66.17 90 bottom
JP161  FIDUCIAL1X2  [FIDUCIAL-1X2]  133.48,73.53 180 top
JP162  FIDUCIAL1X2  [FIDUCIAL-1X2]  150.88,58.8 180 top
JP163  FIDUCIAL1X2  [FIDUCIAL-1X2]  133.48,73.53 180 bottom
JP164  FIDUCIAL1X2  [FIDUCIAL-1X2]  152.27,59.18 180 bottom
JP165  [SMT-JUMPER_3_1-NC_TRACE_SILK]  136.27,66.17 90 bottom
JP166  FIDUCIAL1X2  [FIDUCIAL-1X2]  158.12,73.53 180 top
JP167  FIDUCIAL1X2  [FIDUCIAL-1X2]  175.51,58.8 180 top
JP168  FIDUCIAL1X2  [FIDUCIAL-1X2]  158.12,73.53 180 bottom
JP169  FIDUCIAL1X2  [FIDUCIAL-1X2]  176.91,59.18 180 bottom
JP170  [SMT-JUMPER_3_1-NC_TRACE_SILK]  160.91,66.17 90 bottom
JP171  FIDUCIAL1X2  [FIDUCIAL-1X2]  182.75,73.53 180 top
JP172  FIDUCIAL1X2  [FIDUCIAL-1X2]  200.15,58.8 180 top
JP173  FIDUCIAL1X2  [FIDUCIAL-1X2]  182.75,73.53 180 bottom
JP174  FIDUCIAL1X2  [FIDUCIAL-1X2]  201.55,59.18 180 bottom
JP175  [SMT-JUMPER_3_1-NC_TRACE_SILK]  185.55,66.17 90 bottom
JP176  FIDUCIAL1X2  [FIDUCIAL-1X2]  207.39,73.53 180 top
JP177  FIDUCIAL1X2  [FIDUCIAL-1X2]  224.79,58.8 180 top
JP178  FIDUCIAL1X2  [FIDUCIAL-1X2]  207.39,73.53 180 bottom
JP179  FIDUCIAL1X2  [FIDUCIAL-1X2]  226.19,59.18 180 bottom
JP180  [SMT-JUMPER_3_1-NC_TRACE_SILK]  210.19,66.17 90 bottom
JP181  FIDUCIAL1X2  [FIDUCIAL-1X2]  10.29,90.55 180 top
JP182  FIDUCIAL1X2  [FIDUCIAL-1X2]  27.69,75.82 180 top
JP183  FIDUCIAL1X2  [FIDUCIAL-1X2]  10.29,90.55 180 bottom
JP184  FIDUCIAL1X2  [FIDUCIAL-1X2]  29.08,76.2 180 bottom
JP185  [SMT-JUMPER_3_1-NC_TRACE_SILK]  13.08,83.19 90 bottom
JP186  FIDUCIAL1X2  [FIDUCIAL-1X2]  34.92,90.55 180 top
JP187  FIDUCIAL1X2  [FIDUCIAL-1X2]  52.32,75.82 180 top
JP188  FIDUCIAL1X2  [FIDUCIAL-1X2]  34.92,90.55 180 bottom
JP189  FIDUCIAL1X2  [FIDUCIAL-1X2]  53.72,76.2 180 bottom
JP190  [SMT-JUMPER_3_1-NC_TRACE_SILK]  37.72,83.19 90 bottom
JP191  FIDUCIAL1X2  [FIDUCIAL-1X2]  59.56,90.55 180 top
JP192  FIDUCIAL1X2  [FIDUCIAL-1X2]  76.96,75.82 180 top
JP193  FIDUCIAL1X2  [FIDUCIAL-1X2]  59.56,90.55 180 bottom
JP194  FIDUCIAL1X2  [FIDUCIAL-1X2]  78.36,76.2 180 bottom
JP195  [SMT-JUMPER_3_1-NC_TRACE_SILK]  62.36,83.19 90 bottom
JP196  FIDUCIAL1X2  [FIDUCIAL-1X2]  84.2,90.55 180 top
JP197  FIDUCIAL1X2  [FIDUCIAL-1X2]  101.6,75.82 180 top
JP198  FIDUCIAL1X2  [FIDUCIAL-1X2]  84.2,90.55 180 bottom
JP199  FIDUCIAL1X2  [FIDUCIAL-1X2]  103,76.2 180 bottom
JP200  [SMT-JUMPER_3_1-NC_TRACE_SILK]  86.99,83.19 90 bottom
JP201  FIDUCIAL1X2  [FIDUCIAL-1X2]  108.84,90.55 180 top
JP202  FIDUCIAL1X2  [FIDUCIAL-1X2]  126.24,75.82 180 top
JP203  FIDUCIAL1X2  [FIDUCIAL-1X2]  108.84,90.55 180 bottom
JP204  FIDUCIAL1X2  [FIDUCIAL-1X2]  127.63,76.2 180 bottom
JP205  [SMT-JUMPER_3_1-NC_TRACE_SILK]  111.63,83.19 90 bottom
JP206  FIDUCIAL1X2  [FIDUCIAL-1X2]  133.48,90.55 180 top
JP207  FIDUCIAL1X2  [FIDUCIAL-1X2]  150.88,75.82 180 top
JP208  FIDUCIAL1X2  [FIDUCIAL-1X2]  133.48,90.55 180 bottom
JP209  FIDUCIAL1X2  [FIDUCIAL-1X2]  152.27,76.2 180 bottom
JP210  [SMT-JUMPER_3_1-NC_TRACE_SILK]  136.27,83.19 90 bottom
JP211  FIDUCIAL1X2  [FIDUCIAL-1X2]  158.12,90.55 180 top
JP212  FIDUCIAL1X2  [FIDUCIAL-1X2]  175.51,75.82 180 top
JP213  FIDUCIAL1X2  [FIDUCIAL-1X2]  158.12,90.55 180 bottom
JP214  FIDUCIAL1X2  [FIDUCIAL-1X2]  176.91,76.2 180 bottom
JP215  [SMT-JUMPER_3_1-NC_TRACE_SILK]  160.91,83.19 90 bottom
JP216  FIDUCIAL1X2  [FIDUCIAL-1X2]  182.75,90.55 180 top
JP217  FIDUCIAL1X2  [FIDUCIAL-1X2]  200.15,75.82 180 top
JP218  FIDUCIAL1X2  [FIDUCIAL-1X2]  182.75,90.55 180 bottom
JP219  FIDUCIAL1X2  [FIDUCIAL-1X2]  201.55,76.2 180 bottom
JP220  [SMT-JUMPER_3_1-NC_TRACE_SILK]  185.55,83.19 90 bottom
JP221  FIDUCIAL1X2  [FIDUCIAL-1X2]  207.39,90.55 180 top
JP222  FIDUCIAL1X2  [FIDUCIAL-1X2]  224.79,75.82 180 top
JP223  FIDUCIAL1X2  [FIDUCIAL-1X2]  207.39,90.55 180 bottom
JP224  FIDUCIAL1X2  [FIDUCIAL-1X2]  226.19,76.2 180 bottom
JP225  [SMT-JUMPER_3_1-NC_TRACE_SILK]  210.19,83.19 90 bottom
JP226  FIDUCIAL1X2  [FIDUCIAL-1X2]  10.29,107.57 180 top
JP227  FIDUCIAL1X2  [FIDUCIAL-1X2]  27.69,92.84 180 top
JP228  FIDUCIAL1X2  [FIDUCIAL-1X2]  10.29,107.57 180 bottom
JP229  FIDUCIAL1X2  [FIDUCIAL-1X2]  29.08,93.22 180 bottom
JP230  [SMT-JUMPER_3_1-NC_TRACE_SILK]  13.08,100.2 90 bottom
JP231  FIDUCIAL1X2  [FIDUCIAL-1X2]  34.92,107.57 180 top
JP232  FIDUCIAL1X2  [FIDUCIAL-1X2]  52.32,92.84 180 top
JP233  FIDUCIAL1X2  [FIDUCIAL-1X2]  34.92,107.57 180 bottom
JP234  FIDUCIAL1X2  [FIDUCIAL-1X2]  53.72,93.22 180 bottom
JP235  [SMT-JUMPER_3_1-NC_TRACE_SILK]  37.72,100.2 90 bottom
JP236  FIDUCIAL1X2  [FIDUCIAL-1X2]  59.56,107.57 180 top
JP237  FIDUCIAL1X2  [FIDUCIAL-1X2]  76.96,92.84 180 top
JP238  FIDUCIAL1X2  [FIDUCIAL-1X2]  59.56,107.57 180 bottom
JP239  FIDUCIAL1X2  [FIDUCIAL-1X2]  78.36,93.22 180 bottom
JP240  [SMT-JUMPER_3_1-NC_TRACE_SILK]  62.36,100.2 90 bottom
JP241  FIDUCIAL1X2  [FIDUCIAL-1X2]  84.2,107.57 180 top
JP242  FIDUCIAL1X2  [FIDUCIAL-1X2]  101.6,92.84 180 top
JP243  FIDUCIAL1X2  [FIDUCIAL-1X2]  84.2,107.57 180 bottom
JP244  FIDUCIAL1X2  [FIDUCIAL-1X2]  103,93.22 180 bottom
JP245  [SMT-JUMPER_3_1-NC_TRACE_SILK]  86.99,100.2 90 bottom
JP246  FIDUCIAL1X2  [FIDUCIAL-1X2]  108.84,107.57 180 top
JP247  FIDUCIAL1X2  [FIDUCIAL-1X2]  126.24,92.84 180 top
JP248  FIDUCIAL1X2  [FIDUCIAL-1X2]  108.84,107.57 180 bottom
JP249  FIDUCIAL1X2  [FIDUCIAL-1X2]  127.63,93.22 180 bottom
JP250  [SMT-JUMPER_3_1-NC_TRACE_SILK]  111.63,100.2 90 bottom
JP251  FIDUCIAL1X2  [FIDUCIAL-1X2]  133.48,107.57 180 top
JP252  FIDUCIAL1X2  [FIDUCIAL-1X2]  150.88,92.84 180 top
JP253  FIDUCIAL1X2  [FIDUCIAL-1X2]  133.48,107.57 180 bottom
JP254  FIDUCIAL1X2  [FIDUCIAL-1X2]  152.27,93.22 180 bottom
JP255  [SMT-JUMPER_3_1-NC_TRACE_SILK]  136.27,100.2 90 bottom
JP256  FIDUCIAL1X2  [FIDUCIAL-1X2]  158.12,107.57 180 top
JP257  FIDUCIAL1X2  [FIDUCIAL-1X2]  175.51,92.84 180 top
JP258  FIDUCIAL1X2  [FIDUCIAL-1X2]  158.12,107.57 180 bottom
JP259  FIDUCIAL1X2  [FIDUCIAL-1X2]  176.91,93.22 180 bottom
JP260  [SMT-JUMPER_3_1-NC_TRACE_SILK]  160.91,100.2 90 bottom
JP261  FIDUCIAL1X2  [FIDUCIAL-1X2]  182.75,107.57 180 top
JP262  FIDUCIAL1X2  [FIDUCIAL-1X2]  200.15,92.84 180 top
JP263  FIDUCIAL1X2  [FIDUCIAL-1X2]  182.75,107.57 180 bottom
JP264  FIDUCIAL1X2  [FIDUCIAL-1X2]  201.55,93.22 180 bottom
JP265  [SMT-JUMPER_3_1-NC_TRACE_SILK]  185.55,100.2 90 bottom
JP266  FIDUCIAL1X2  [FIDUCIAL-1X2]  207.39,107.57 180 top
JP267  FIDUCIAL1X2  [FIDUCIAL-1X2]  224.79,92.84 180 top
JP268  FIDUCIAL1X2  [FIDUCIAL-1X2]  207.39,107.57 180 bottom
JP269  FIDUCIAL1X2  [FIDUCIAL-1X2]  226.19,93.22 180 bottom
JP270  [SMT-JUMPER_3_1-NC_TRACE_SILK]  210.19,100.2 90 bottom
LED1  GREEN  [LED-0603]  28.45,19.18 270 top
LED2  GREEN  [LED-0603]  53.09,19.18 270 top
LED3  GREEN  [LED-0603]  77.72,19.18 270 top
LED4  GREEN  [LED-0603]  102.36,19.18 270 top
LED5  GREEN  [LED-0603]  127,19.18 270 top
LED6  GREEN  [LED-0603]  151.64,19.18 270 top
LED7  GREEN  [LED-0603]  176.28,19.18 270 top
LED8  GREEN  [LED-0603]  200.91,19.18 270 top
LED9  GREEN  [LED-0603]  225.55,19.18 270 top
LED10  GREEN  [LED-0603]  28.45,36.2 270 top
LED11  GREEN  [LED-0603]  53.09,36.2 270 top
LED12  GREEN  [LED-0603]  77.72,36.2 270 top
LED13  GREEN  [LED-0603]  102.36,36.2 270 top
LED14  GREEN  [LED-0603]  127,36.2 270 top
LED15  GREEN  [LED-0603]  151.64,36.2 270 top
LED16  GREEN  [LED-0603]  176.28,36.2 270 top
LED17  GREEN  [LED-0603]  200.91,36.2 270 top
LED18  GREEN  [LED-0603]  225.55,36.2 270 top
LED19  GREEN  [LED-0603]  28.45,53.21 270 top
LED20  GREEN  [LED-0603]  53.09,53.21 270 top
LED21  GREEN  [LED-0603]  77.72,53.21 270 top
LED22  GREEN  [LED-0603]  102.36,53.21 270 top
LED23  GREEN  [LED-0603]  127,53.21 270 top
LED24  GREEN  [LED-0603]  151.64,53.21 270 top
LED25  GREEN  [LED-0603]  176.28,53.21 270 top
LED26  GREEN  [LED-0603]  200.91,53.21 270 top
LED27  GREEN  [LED-0603]  225.55,53.21 270 top
LED28  GREEN  [LED-0603]  28.45,70.23 270 top
LED29  GREEN  [LED-0603]  53.09,70.23 270 top
LED30  GREEN  [LED-0603]  77.72,70.23 270 top
LED31  GREEN  [LED-0603]  102.36,70.23 270 top
LED32  GREEN  [LED-0603]  127,70.23 270 top
LED33  GREEN  [LED-0603]  151.64,70.23 270 top
LED34  GREEN  [LED-0603]  176.28,70.23 270 top
LED35  GREEN  [LED-0603]  200.91,70.23 270 top
LED36  GREEN  [LED-0603]  225.55,70.23 270 top
LED37  GREEN  [LED-0603]  28.45,87.25 270 top
LED38  GREEN  [LED-0603]  53.09,87.25 270 top
LED39  GREEN  [LED-0603]  77.72,87.25 270 top
LED40  GREEN  [LED-0603]  102.36,87.25 270 top
LED41  GREEN  [LED-0603]  127,87.25 270 top
LED42  GREEN  [LED-0603]  151.64,87.25 270 top
LED43  GREEN  [LED-0603]  176.28,87.25 270 top
LED44  GREEN  [LED-0603]  200.91,87.25 270 top
LED45  GREEN  [LED-0603]  225.55,87.25 270 top
LED46  GREEN  [LED-0603]  28.45,104.27 270 top
LED47  GREEN  [LED-0603]  53.09,104.27 270 top
LED48  GREEN  [LED-0603]  77.72,104.27 270 top
LED49  GREEN  [LED-0603]  102.36,104.27 270 top
LED50  GREEN  [LED-0603]  127,104.27 270 top
LED51  GREEN  [LED-0603]  151.64,104.27 270 top
LED52  GREEN  [LED-0603]  176.28,104.27 270 top
LED53  GREEN  [LED-0603]  200.91,104.27 270 top
LED54  GREEN  [LED-0603]  225.55,104.27 270 top
LOGO1  OSHW-LOGOS  [OSHW-LOGO-S]  12.7,21.46 0 bottom
LOGO2  SFE_LOGO_FLAME.1_INCH  [SFE_LOGO_FLAME_.1]  10.79,15.37 0 bottom
LOGO3  SFE_LOGO_NAME.1_INCH  [SFE_LOGO_NAME_.1]  21.97,21.59 0 top
LOGO4  OSHW-LOGOS  [OSHW-LOGO-S]  37.34,21.46 0 bottom
LOGO5  SFE_LOGO_FLAME.1_INCH  [SFE_LOGO_FLAME_.1]  35.43,15.37 0 bottom
LOGO6  SFE_LOGO_NAME.1_INCH  [SFE_LOGO_NAME_.1]  46.61,21.59 0 top
LOGO7  OSHW-LOGOS  [OSHW-LOGO-S]  61.98,21.46 0 bottom
LOGO8  SFE_LOGO_FLAME.1_INCH  [SFE_LOGO_FLAME_.1]  60.07,15.37 0 bottom
LOGO9  SFE_LOGO_NAME.1_INCH  [SFE_LOGO_NAME_.1]  71.25,21.59 0 top
LOGO10  OSHW-LOGOS  [OSHW-LOGO-S]  86.61,21.46 0 bottom
LOGO11  SFE_LOGO_FLAME.1_INCH  [SFE_LOGO_FLAME_.1]  84.71,15.37 0 bottom
LOGO12  SFE_LOGO_NAME.1_INCH  [SFE_LOGO_NAME_.1]  95.88,21.59 0 top
LOGO13  OSHW-LOGOS  [OSHW-LOGO-S]  111.25,21.46 0 bottom
LOGO14  SFE_LOGO_FLAME.1_INCH  [SFE_LOGO_FLAME_.1]  109.35,15.37 0 bottom
LOGO15  SFE_LOGO_NAME.1_INCH  [SFE_LOGO_NAME_.1]  120.52,21.59 0 top
LOGO16  OSHW-LOGOS  [OSHW-LOGO-S]  135.89,21.46 0 bottom
LOGO17  SFE_LOGO_FLAME.1_INCH  [SFE_LOGO_FLAME_.1]  133.99,15.37 0 bottom
LOGO18  SFE_LOGO_NAME.1_INCH  [SFE_LOGO_NAME_.1]  145.16,21.59 0 top
LOGO19  OSHW-LOGOS  [OSHW-LOGO-S]  160.53,21.46 0 bottom
LOGO20  SFE_LOGO_FLAME.1_INCH  [SFE_LOGO_FLAME_.1]  158.62,15.37 0 bottom
LOGO21  SFE_LOGO_NAME.1_INCH  [SFE_LOGO_NAME_.1]  169.8,21.59 0 top
LOGO22  OSHW-LOGOS  [OSHW-LOGO-S]  185.17,21.46 0 bottom
LOGO23  SFE_LOGO_FLAME.1_INCH  [SFE_LOGO_FLAME_.1]  183.26,15.37 0 bottom
LOGO24  SFE_LOGO_NAME.1_INCH  [SFE_LOGO_NAME_.1]  194.44,21.59 0 top
LOGO25  OSHW-LOGOS  [OSHW-LOGO-S]  209.8,21.46 0 bottom
LOGO26  SFE_LOGO_FLAME.1_INCH  [SFE_LOGO_FLAME_.1]  207.9,15.37 0 bottom
LOGO27  SFE_LOGO_NAME.1_INCH  [SFE_LOGO_NAME_.1]  219.07,21.59 0 top
LOGO28  OSHW-LOGOS  [OSHW-LOGO-S]  12.7,38.48 0 bottom
LOGO29  SFE_LOGO_FLAME.1_INCH  [SFE_LOGO_FLAME_.1]  10.79,32.38 0 bottom
LOGO30  SFE_LOGO_NAME.1_INCH  [SFE_LOGO_NAME_.1]  21.97,38.61 0 top
LOGO31  OSHW-LOGOS  [OSHW-LOGO-S]  37.34,38.48 0 bottom
LOGO32  SFE_LOGO_FLAME.1_INCH  [SFE_LOGO_FLAME_.1]  35.43,32.38 0 bottom
LOGO33  SFE_LOGO_NAME.1_INCH  [SFE_LOGO_NAME_.1]  46.61,38.61 0 top
LOGO34  OSHW-LOGOS  [OSHW-LOGO-S]  61.98,38.48 0 bottom
LOGO35  SFE_LOGO_FLAME.1_INCH  [SFE_LOGO_FLAME_.1]  60.07,32.38 0 bottom
LOGO36  SFE_LOGO_NAME.1_INCH  [SFE_LOGO_NAME_.1]  71.25,38.61 0 top
LOGO37  OSHW-LOGOS  [OSHW-LOGO-S]  86.61,38.48 0 bottom
LOGO38  SFE_LOGO_FLAME.1_INCH  [SFE_LOGO_FLAME_.1]  84.71,32.38 0 bottom
LOGO39  SFE_LOGO_NAME.1_INCH  [SFE_LOGO_NAME_.1]  95.88,38.61 0 top
LOGO40  OSHW-LOGOS  [OSHW-LOGO-S]  111.25,38.48 0 bottom
LOGO41  SFE_LOGO_FLAME.1_INCH  [SFE_LOGO_FLAME_.1]  109.35,32.38 0 bottom
LOGO42  SFE_LOGO_NAME.1_INCH  [SFE_LOGO_NAME_.1]  120.52,38.61 0 top
LOGO43  OSHW-LOGOS  [OSHW-LOGO-S]  135.89,38.48 0 bottom
LOGO44  SFE_LOGO_FLAME.1_INCH  [SFE_LOGO_FLAME_.1]  133.99,32.38 0 bottom
LOGO45  SFE_LOGO_NAME.1_INCH  [SFE_LOGO_NAME_.1]  145.16,38.61 0 top
LOGO46  OSHW-LOGOS  [OSHW-LOGO-S]  160.53,38.48 0 bottom
LOGO47  SFE_LOGO_FLAME.1_INCH  [SFE_LOGO_FLAME_.1]  158.62,32.38 0 bottom
LOGO48  SFE_LOGO_NAME.1_INCH  [SFE_LOGO_NAME_.1]  169.8,38.61 0 top
LOGO49  OSHW-LOGOS  [OSHW-LOGO-S]  185.17,38.48 0 bottom
LOGO50  SFE_LOGO_FLAME.1_INCH  [SFE_LOGO_FLAME_.1]  183.26,32.38 0 bottom
LOGO51  SFE_LOGO_NAME.1_INCH  [SFE_LOGO_NAME_.1]  194.44,38.61 0 top
LOGO52  OSHW-LOGOS  [OSHW-LOGO-S]  209.8,38.48 0 bottom
LOGO53  SFE_LOGO_FLAME.1_INCH  [SFE_LOGO_FLAME_.1]  207.9,32.38 0 bottom
LOGO54  SFE_LOGO_NAME.1_INCH  [SFE_LOGO_NAME_.1]  219.07,38.61 0 top
LOGO55  OSHW-LOGOS  [OSHW-LOGO-S]  12.7,55.5 0 bottom
LOGO56  SFE_LOGO_FLAME.1_INCH  [SFE_LOGO_FLAME_.1]  10.79,49.4 0 bottom
LOGO57  SFE_LOGO_NAME.1_INCH  [SFE_LOGO_NAME_.1]  21.97,55.63 0 top
LOGO58  OSHW-LOGOS  [OSHW-LOGO-S]  37.34,55.5 0 bottom
LOGO59  SFE_LOGO_FLAME.1_INCH  [SFE_LOGO_FLAME_.1]  35.43,49.4 0 bottom
LOGO60  SFE_LOGO_NAME.1_INCH  [SFE_LOGO_NAME_.1]  46.61,55.63 0 top
LOGO61  OSHW-LOGOS  [OSHW-LOGO-S]  61.98,55.5 0 bottom
LOGO62  SFE_LOGO_FLAME.1_INCH  [SFE_LOGO_FLAME_.1]  60.07,49.4 0 bottom
LOGO63  SFE_LOGO_NAME.1_INCH  [SFE_LOGO_NAME_.1]  71.25,55.63 0 top
LOGO64  OSHW-LOGOS  [OSHW-LOGO-S]  86.61,55.5 0 bottom
LOGO65  SFE_LOGO_FLAME.1_INCH  [SFE_LOGO_FLAME_.1]  84.71,49.4 0 bottom
LOGO66  SFE_LOGO_NAME.1_INCH  [SFE_LOGO_NAME_.1]  95.88,55.63 0 top
LOGO67  OSHW-LOGOS  [OSHW-LOGO-S]  111.25,55.5 0 bottom
LOGO68  SFE_LOGO_FLAME.1_INCH  [SFE_LOGO_FLAME_.1]  109.35,49.4 0 bottom
LOGO69  SFE_LOGO_NAME.1_INCH  [SFE_LOGO_NAME_.1]  120.52,55.63 0 top
LOGO70  OSHW-LOGOS  [OSHW-LOGO-S]  135.89,55.5 0 bottom
LOGO71  SFE_LOGO_FLAME.1_INCH  [SFE_LOGO_FLAME_.1]  133.99,49.4 0 bottom
LOGO72  SFE_LOGO_NAME.1_INCH  [SFE_LOGO_NAME_.1]  145.16,55.63 0 top
LOGO73  OSHW-LOGOS  [OSHW-LOGO-S]  160.53,55.5 0 bottom
LOGO74  SFE_LOGO_FLAME.1_INCH  [SFE_LOGO_FLAME_.1]  158.62,49.4 0 bottom
LOGO75  SFE_LOGO_NAME.1_INCH  [SFE_LOGO_NAME_.1]  169.8,55.63 0 top
LOGO76  OSHW-LOGOS  [OSHW-LOGO-S]  185.17,55.5 0 bottom
LOGO77  SFE_LOGO_FLAME.1_INCH  [SFE_LOGO_FLAME_.1]  183.26,49.4 0 bottom
LOGO78  SFE_LOGO_NAME.1_INCH  [SFE_LOGO_NAME_.1]  194.44,55.63 0 top
LOGO79  OSHW-LOGOS  [OSHW-LOGO-S]  209.8,55.5 0 bottom
LOGO80  SFE_LOGO_FLAME.1_INCH  [SFE_LOGO_FLAME_.1]  207.9,49.4 0 bottom
LOGO81  SFE_LOGO_NAME.1_INCH  [SFE_LOGO_NAME_.1]  219.07,55.63 0 top
LOGO82  OSHW-LOGOS  [OSHW-LOGO-S]  12.7,72.52 0 bottom
LOGO83  SFE_LOGO_FLAME.1_INCH  [SFE_LOGO_FLAME_.1]  10.79,66.42 0 bottom
LOGO84  SFE_LOGO_NAME.1_INCH  [SFE_LOGO_NAME_.1]  21.97,72.64 0 top
LOGO85  OSHW-LOGOS  [OSHW-LOGO-S]  37.34,72.52 0 bottom
LOGO86  SFE_LOGO_FLAME.1_INCH  [SFE_LOGO_FLAME_.1]  35.43,66.42 0 bottom
LOGO87  SFE_LOGO_NAME.1_INCH  [SFE_LOGO_NAME_.1]  46.61,72.64 0 top
LOGO88  OSHW-LOGOS  [OSHW-LOGO-S]  61.98,72.52 0 bottom
LOGO89  SFE_LOGO_FLAME.1_INCH  [SFE_LOGO_FLAME_.1]  60.07,66.42 0 bottom
LOGO90  SFE_LOGO_NAME.1_INCH  [SFE_LOGO_NAME_.1]  71.25,72.64 0 top
LOGO91  OSHW-LOGOS  [OSHW-LOGO-S]  86.61,72.52 0 bottom
LOGO92  SFE_LOGO_FLAME.1_INCH  [SFE_LOGO_FLAME_.1]  84.71,66.42 0 bottom
LOGO93  SFE_LOGO_NAME.1_INCH  [SFE_LOGO_NAME_.1]  95.88,72.64 0 top
LOGO94  OSHW-LOGOS  [OSHW-LOGO-S]  111.25,72.52 0 bottom
LOGO95  SFE_LOGO_FLAME.1_INCH  [SFE_LOGO_FLAME_.1]  109.35,66.42 0 bottom
LOGO96  SFE_LOGO_NAME.1_INCH  [SFE_LOGO_NAME_.1]  120.52,72.64 0 top
LOGO97  OSHW-LOGOS  [OSHW-LOGO-S]  135.89,72.52 0 bottom
LOGO98  SFE_LOGO_FLAME.1_INCH  [SFE_LOGO_FLAME_.1]  133.99,66.42 0 bottom
LOGO99  SFE_LOGO_NAME.1_INCH  [SFE_LOGO_NAME_.1]  145.16,72.64 0 top
LOGO100  OSHW-LOGOS  [OSHW-LOGO-S]  160.53,72.52 0 bottom
LOGO101  SFE_LOGO_FLAME.1_INCH  [SFE_LOGO_FLAME_.1]  158.62,66.42 0 bottom
LOGO102  SFE_LOGO_NAME.1_INCH  [SFE_LOGO_NAME_.1]  169.8,72.64 0 top
LOGO103  OSHW-LOGOS  [OSHW-LOGO-S]  185.17,72.52 0 bottom
LOGO104  SFE_LOGO_FLAME.1_INCH  [SFE_LOGO_FLAME_.1]  183.26,66.42 0 bottom
LOGO105  SFE_LOGO_NAME.1_INCH  [SFE_LOGO_NAME_.1]  194.44,72.64 0 top
LOGO106  OSHW-LOGOS  [OSHW-LOGO-S]  209.8,72.52 0 bottom
LOGO107  SFE_LOGO_FLAME.1_INCH  [SFE_LOGO_FLAME_.1]  207.9,66.42 0 bottom
LOGO108  SFE_LOGO_NAME.1_INCH  [SFE_LOGO_NAME_.1]  219.07,72.64 0 top
LOGO109  OSHW-LOGOS  [OSHW-LOGO-S]  12.7,89.54 0 bottom
LOGO110  SFE_LOGO_FLAME.1_INCH  [SFE_LOGO_FLAME_.1]  10.79,83.44 0 bottom
LOGO111  SFE_LOGO_NAME.1_INCH  [SFE_LOGO_NAME_.1]  21.97,89.66 0 top
LOGO112  OSHW-LOGOS  [OSHW-LOGO-S]  37.34,89.54 0 bottom
LOGO113  SFE_LOGO_FLAME.1_INCH  [SFE_LOGO_FLAME_.1]  35.43,83.44 0 bottom
LOGO114  SFE_LOGO_NAME.1_INCH  [SFE_LOGO_NAME_.1]  46.61,89.66 0 top
LOGO115  OSHW-LOGOS  [OSHW-LOGO-S]  61.98,89.54 0 bottom
LOGO116  SFE_LOGO_FLAME.1_INCH  [SFE_LOGO_FLAME_.1]  60.07,83.44 0 bottom
LOGO117  SFE_LOGO_NAME.1_INCH  [SFE_LOGO_NAME_.1]  71.25,89.66 0 top
LOGO118  OSHW-LOGOS  [OSHW-LOGO-S]  86.61,89.54 0 bottom
LOGO119  SFE_LOGO_FLAME.1_INCH  [SFE_LOGO_FLAME_.1]  84.71,83.44 0 bottom
LOGO120  SFE_LOGO_NAME.1_INCH  [SFE_LOGO_NAME_.1]  95.88,89.66 0 top
LOGO121  OSHW-LOGOS  [OSHW-LOGO-S]  111.25,89.54 0 bottom
LOGO122  SFE_LOGO_FLAME.1_INCH  [SFE_LOGO_FLAME_.1]  109.35,83.44 0 bottom
LOGO123  SFE_LOGO_NAME.1_INCH  [SFE_LOGO_NAME_.1]  120.52,89.66 0 top
LOGO124  OSHW-LOGOS  [OSHW-LOGO-S]  135.89,89.54 0 bottom
LOGO125  SFE_LOGO_FLAME.1_INCH  [SFE_LOGO_FLAME_.1]  133.99,83.44 0 bottom
LOGO126  SFE_LOGO_NAME.1_INCH  [SFE_LOGO_NAME_.1]  145.16,89.66 0 top
LOGO127  OSHW-LOGOS  [OSHW-LOGO-S]  160.53,89.54 0 bottom
LOGO128  SFE_LOGO_FLAME.1_INCH  [SFE_LOGO_FLAME_.1]  158.62,83.44 0 bottom
LOGO129  SFE_LOGO_NAME.1_INCH  [SFE_LOGO_NAME_.1]  169.8,89.66 0 top
LOGO130  OSHW-LOGOS  [OSHW-LOGO-S]  185.17,89.54 0 bottom
LOGO131  SFE_LOGO_FLAME.1_INCH  [SFE_LOGO_FLAME_.1]  183.26,83.44 0 bottom
LOGO132  SFE_LOGO_NAME.1_INCH  [SFE_LOGO_NAME_.1]  194.44,89.66 0 top
LOGO133  OSHW-LOGOS  [OSHW-LOGO-S]  209.8,89.54 0 bottom
LOGO134  SFE_LOGO_FLAME.1_INCH  [SFE_LOGO_FLAME_.1]  207.9,83.44 0 bottom
LOGO135  SFE_LOGO_NAME.1_INCH  [SFE_LOGO_NAME_.1]  219.07,89.66 0 top
LOGO136  OSHW-LOGOS  [OSHW-LOGO-S]  12.7,106.55 0 bottom
LOGO137  SFE_LOGO_FLAME.1_INCH  [SFE_LOGO_FLAME_.1]  10.79,100.46 0 bottom
LOGO138  SFE_LOGO_NAME.1_INCH  [SFE_LOGO_NAME_.1]  21.97,106.68 0 top
LOGO139  OSHW-LOGOS  [OSHW-LOGO-S]  37.34,106.55 0 bottom
LOGO140  SFE_LOGO_FLAME.1_INCH  [SFE_LOGO_FLAME_.1]  35.43,100.46 0 bottom
LOGO141  SFE_LOGO_NAME.1_INCH  [SFE_LOGO_NAME_.1]  46.61,106.68 0 top
LOGO142  OSHW-LOGOS  [OSHW-LOGO-S]  61.98,106.55 0 bottom
LOGO143  SFE_LOGO_FLAME.1_INCH  [SFE_LOGO_FLAME_.1]  60.07,100.46 0 bottom
LOGO144  SFE_LOGO_NAME.1_INCH  [SFE_LOGO_NAME_.1]  71.25,106.68 0 top
LOGO145  OSHW-LOGOS  [OSHW-LOGO-S]  86.61,106.55 0 bottom
LOGO146  SFE_LOGO_FLAME.1_INCH  [SFE_LOGO_FLAME_.1]  84.71,100.46 0 bottom
LOGO147  SFE_LOGO_NAME.1_INCH  [SFE_LOGO_NAME_.1]  95.88,106.68 0 top
LOGO148  OSHW-LOGOS  [OSHW-LOGO-S]  111.25,106.55 0 bottom
LOGO149  SFE_LOGO_FLAME.1_INCH  [SFE_LOGO_FLAME_.1]  109.35,100.46 0 bottom
LOGO150  SFE_LOGO_NAME.1_INCH  [SFE_LOGO_NAME_.1]  120.52,106.68 0 top
LOGO151  OSHW-LOGOS  [OSHW-LOGO-S]  135.89,106.55 0 bottom
LOGO152  SFE_LOGO_FLAME.1_INCH  [SFE_LOGO_FLAME_.1]  133.99,100.46 0 bottom
LOGO153  SFE_LOGO_NAME.1_INCH  [SFE_LOGO_NAME_.1]  145.16,106.68 0 top
LOGO154  OSHW-LOGOS  [OSHW-LOGO-S]  160.53,106.55 0 bottom
LOGO155  SFE_LOGO_FLAME.1_INCH  [SFE_LOGO_FLAME_.1]  158.62,100.46 0 bottom
LOGO156  SFE_LOGO_NAME.1_INCH  [SFE_LOGO_NAME_.1]  169.8,106.68 0 top
LOGO157  OSHW-LOGOS  [OSHW-LOGO-S]  185.17,106.55 0 bottom
LOGO158  SFE_LOGO_FLAME.1_INCH  [SFE_LOGO_FLAME_.1]  183.26,100.46 0 bottom
LOGO159  SFE_LOGO_NAME.1_INCH  [SFE_LOGO_NAME_.1]  194.44,106.68 0 top
LOGO160  OSHW-LOGOS  [OSHW-LOGO-S]  209.8,106.55 0 bottom
LOGO161  SFE_LOGO_FLAME.1_INCH  [SFE_LOGO_FLAME_.1]  207.9,100.46 0 bottom
LOGO162  SFE_LOGO_NAME.1_INCH  [SFE_LOGO_NAME_.1]  219.07,106.68 0 top
R1  5.1k  [0603]  12.57,8.64 90 top
R2  5.1k  [0603]  37.21,8.64 90 top
R3  5.1k  [0603]  37.21,21.59 270 top
R4  5.1k  [0603]  12.57,21.59 270 top
R5  1k  [0603]  27.05,15.88 270 top
R6  1k  [0603]  27.05,19.18 270 top
R7  1k  [0603]  51.69,15.88 270 top
R8  1k  [0603]  51.69,19.18 270 top
R9  5.1k  [0603]  61.85,8.64 90 top
R10  5.1k  [0603]  61.85,21.59 270 top
R11  1k  [0603]  76.33,15.88 270 top
R12  1k  [0603]  76.33,19.18 270 top
R13  5.1k  [0603]  86.49,8.64 90 top
R14  5.1k  [0603]  86.49,21.59 270 top
R15  1k  [0603]  100.96,15.88 270 top
R16  1k  [0603]  100.96,19.18 270 top
R17  5.1k  [0603]  111.12,8.64 90 top
R18  5.1k  [0603]  111.12,21.59 270 top
R19  1k  [0603]  125.6,15.88 270 top
R20  1k  [0603]  125.6,19.18 270 top
R21  5.1k  [0603]  135.76,8.64 90 top
R22  5.1k  [0603]  135.76,21.59 270 top
R23  1k  [0603]  150.24,15.88 270 top
R24  1k  [0603]  150.24,19.18 270 top
R25  5.1k  [0603]  160.4,8.64 90 top
R26  5.1k  [0603]  160.4,21.59 270 top
R27  1k  [0603]  174.88,15.88 270 top
R28  1k  [0603]  174.88,19.18 270 top
R29  5.1k  [0603]  185.04,8.64 90 top
R30  5.1k  [0603]  185.04,21.59 270 top
R31  1k  [0603]  199.52,15.88 270 top
R32  1k  [0603]  199.52,19.18 270 top
R33  5.1k  [0603]  209.68,8.64 90 top
R34  5.1k  [0603]  209.68,21.59 270 top
R35  1k  [0603]  224.16,15.88 270 top
R36  1k  [0603]  224.16,19.18 270 top
R37  5.1k  [0603]  12.57,25.65 90 top
R38  5.1k  [0603]  12.57,38.61 270 top
R39  1k  [0603]  27.05,32.89 270 top
R40  1k  [0603]  27.05,36.2 270 top
R41  5.1k  [0603]  37.21,25.65 90 top
R42  5.1k  [0603]  37.21,38.61 270 top
R43  1k  [0603]  51.69,32.89 270 top
R44  1k  [0603]  51.69,36.2 270 top
R45  5.1k  [0603]  61.85,25.65 90 top
R46  5.1k  [0603]  61.85,38.61 270 top
R47  1k  [0603]  76.33,32.89 270 top
R48  1k  [0603]  76.33,36.2 270 top
R49  5.1k  [0603]  86.49,25.65 90 top
R50  5.1k  [0603]  86.49,38.61 270 top
R51  1k  [0603]  100.96,32.89 270 top
R52  1k  [0603]  100.96,36.2 270 top
R53  5.1k  [0603]  111.12,25.65 90 top
R54  5.1k  [0603]  111.12,38.61 270 top
R55  1k  [0603]  125.6,32.89 270 top
R56  1k  [0603]  125.6,36.2 270 top
R57  5.1k  [0603]  135.76,25.65 90 top
R58  5.1k  [0603]  135.76,38.61 270 top
R59  1k  [0603]  150.24,32.89 270 top
R60  1k  [0603]  150.24,36.2 270 top
R61  5.1k  [0603]  160.4,25.65 90 top
R62  5.1k  [0603]  160.4,38.61 270 top
R63  1k  [0603]  174.88,32.89 270 top
R64  1k  [0603]  174.88,36.2 270 top
R65  5.1k  [0603]  185.04,25.65 90 top
R66  5.1k  [0603]  185.04,38.61 270 top
R67  1k  [0603]  199.52,32.89 270 top
R68  1k  [0603]  199.52,36.2 270 top
R69  5.1k  [0603]  209.68,25.65 90 top
R70  5.1k  [0603]  209.68,38.61 270 top
R71  1k  [0603]  224.16,32.89 270 top
R72  1k  [0603]  224.16,36.2 270 top
R73  5.1k  [0603]  12.57,42.67 90 top
R74  5.1k  [0603]  12.57,55.63 270 top
R75  1k  [0603]  27.05,49.91 270 top
R76  1k  [0603]  27.05,53.21 270 top
R77  5.1k  [0603]  37.21,42.67 90 top